# EAGLE board MBO (EAGLE 7.4.0)
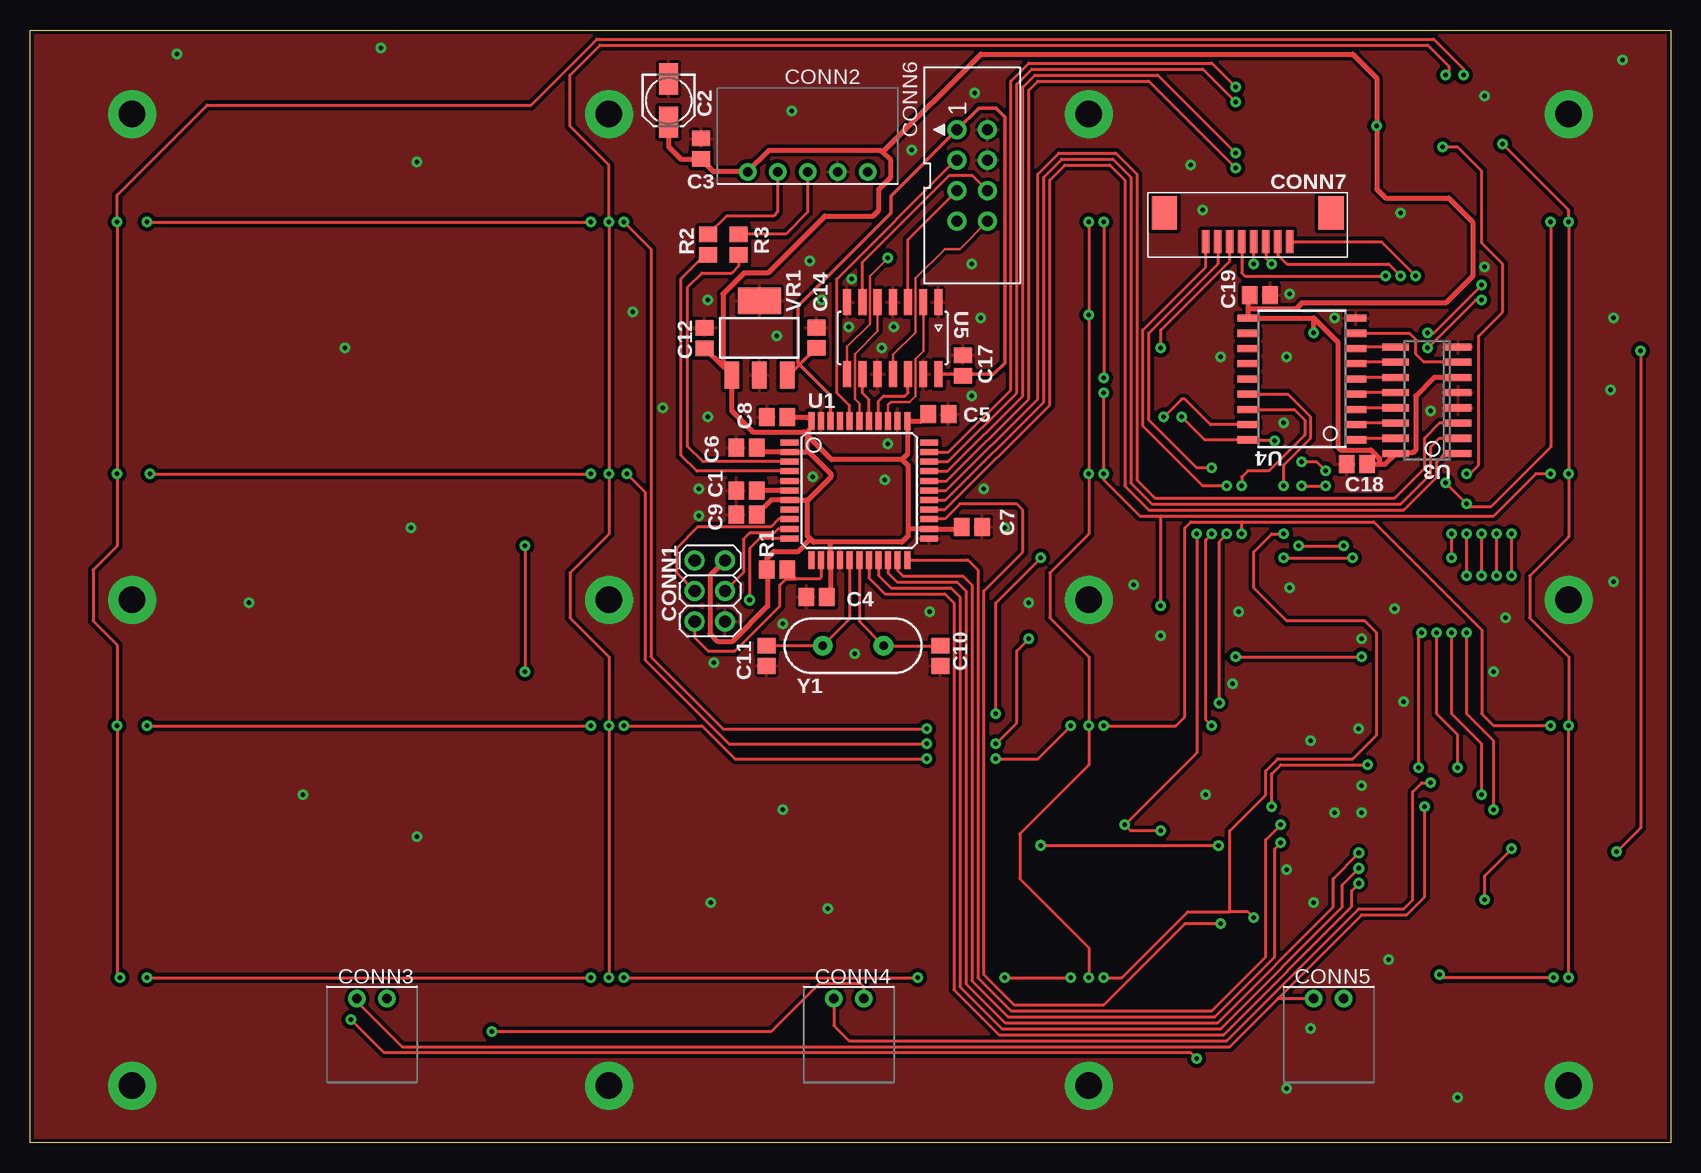
[diagram p0: board, top side]
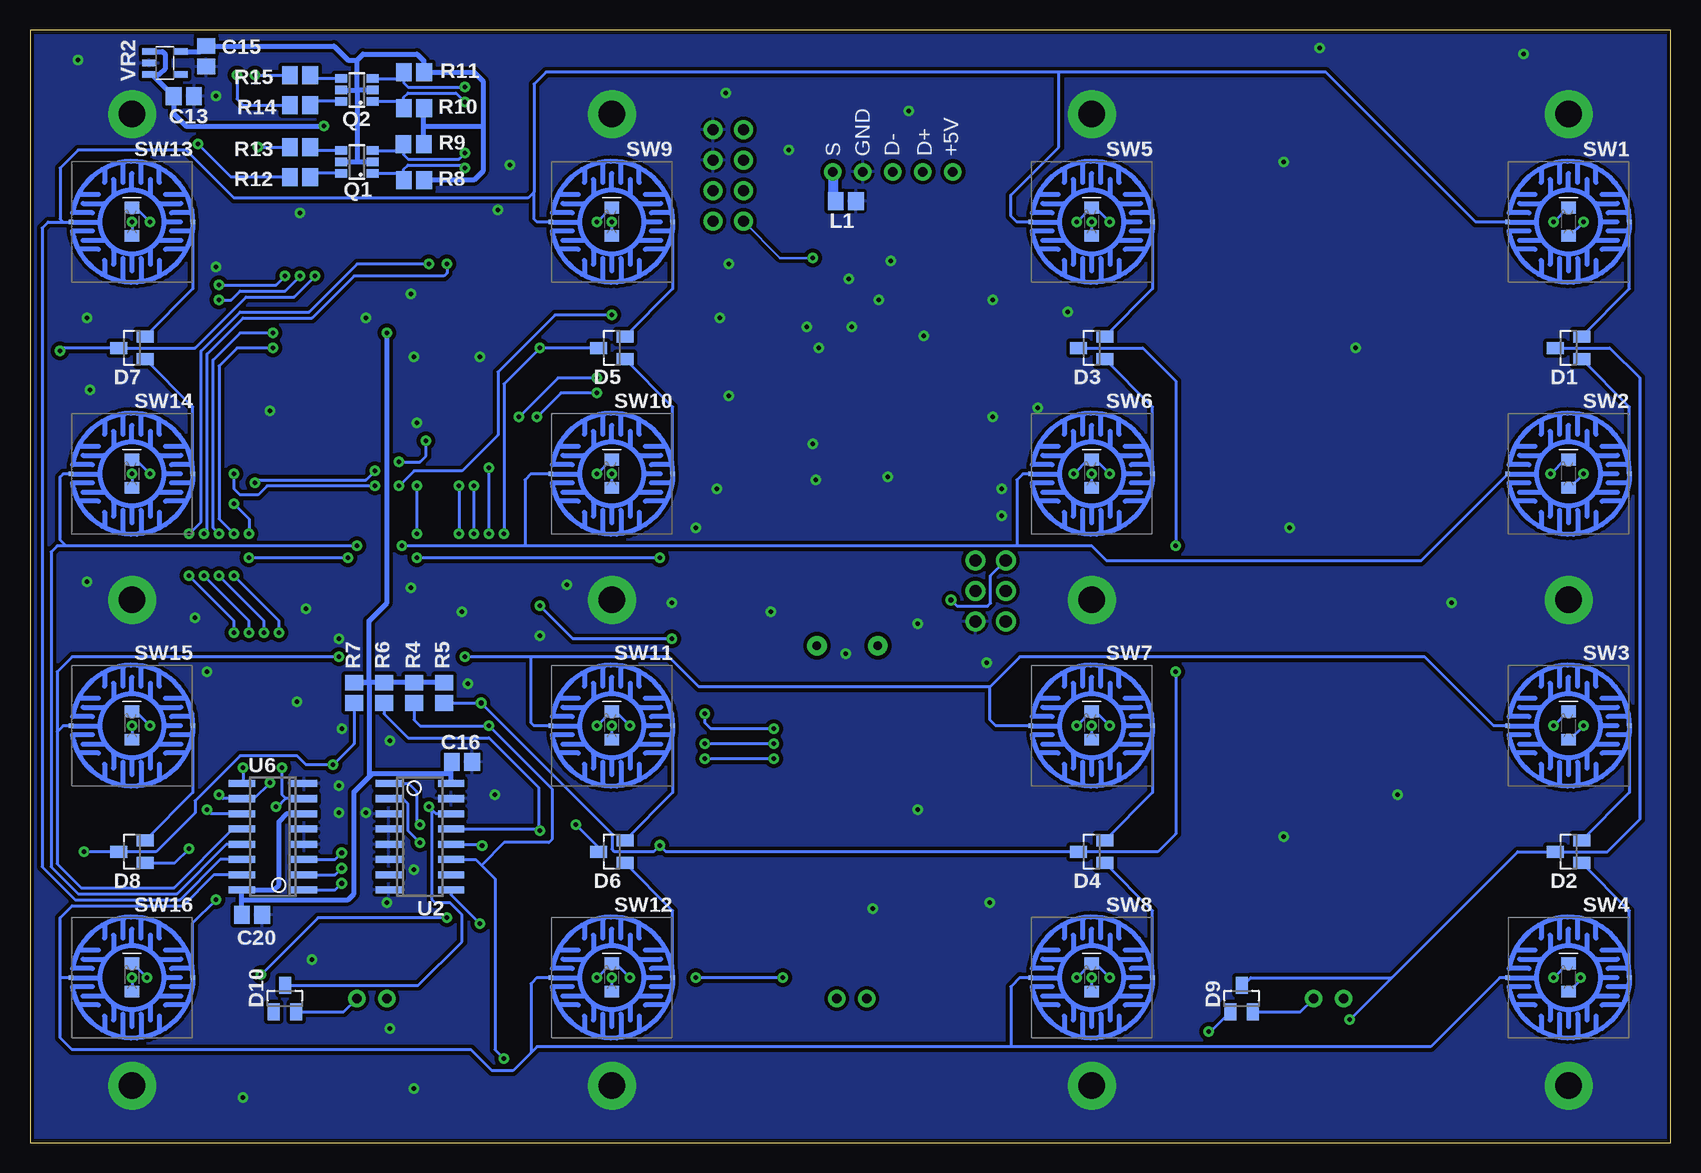
[diagram p1: board, bottom side, seen from below]

Size 136.75 x 92.75 mm. Coordinates in mm from the lower left corner, seen from the top.
Outline: 0,92.75 136.75,92.75 136.75,0 0,0 0,92.75
Copper layers (1*16): Top 0.035mm / dielectric 1.5mm / Bottom 0.035mm
Design rules "smiery *": minimum track width 8mil, minimum drill 12mil, track to track 7mil, track to pad 5mil, pad to pad 5mil, via to via 6mil, smd to smd 0mil, copper to edge 12mil, drill to drill 10mil, minimum pad ring 13mil, minimum via ring 10mil, stop-mask expansion 2mil, vias tented up to drill 25mil, thermal gap 10mil
Net classes: 0 default: width 0.203 mm; 1 vcc: width 0.254 mm

## Footprints (pad centres in the part's own frame; a part is rotated, then mirrored left to right if it is on the bottom)
C0805 = smd 1.3 x 1.5: 1 -0.85,0; 2 0.85,0
153CLV-0405 = smd 2.6 x 1.6: + 1.8,0; - -1.8,0
2X03-2.54-V = drill 1.016: 1 -2.54,-1.27; 2 -2.54,1.27; 3 0,-1.27; 4 0,1.27; 5 2.54,-1.27; 6 2.54,1.27
JST-XH-05P-H = drill 0.8: 1 -5,0; 2 -2.5,0; 3 0,0; 4 2.5,0; 5 5,0
JST-XH-02P-H = drill 0.8: 1 -1.25,0; 2 1.25,0
IDC-08P-2.54 = drill 0.914: 1 -3.81,-1.27; 2 -3.81,1.27; 3 -1.27,-1.27; 4 -1.27,1.27; 5 1.27,-1.27; 6 1.27,1.27; 7 3.81,-1.27; 8 3.81,1.27
MOLEX-52793-0870 = smd 0.6 x 1.9: 1 -3.5,1.4; 2 -2.5,1.4; 3 -1.5,1.4; 4 -0.5,1.4; 5 0.5,1.4; 6 1.5,1.4; 7 2.5,1.4; 8 3.5,1.4 | smd 2.1 x 2.8: P1 -6.95,-1; P2 6.95,-1
SOT23 = smd 1.4 x 1: 1 -1.1,0.95; 2 -1.1,-0.95; 3 1.1,0
0805_LED = smd 0.978 x 1.2: A -1.175,0; C 1.18,0
L0805 = smd 1.3 x 1.5: 1 -0.85,0; 2 0.85,0
SSOT6 = smd 0.99 x 0.69: 1 -1.3,0.95; 2 -1.3,0; 3 -1.3,-0.95; 4 1.3,-0.95; 5 1.3,0; 6 1.3,0.95
R0805 = smd 1.3 x 1.5: 1 -0.85,0; 2 0.85,0
RUBBER_SWITCH_2 = smd 0.4 x 0.4: 1 -5.08,0; 2 5.08,0
TQFP-44 = smd 1.5 x 0.5: 1 -5.8,4; 2 -5.8,3.2; 3 -5.8,2.4; 4 -5.8,1.6; 5 -5.8,0.8; 6 -5.8,0; 7 -5.8,-0.8; 8 -5.8,-1.6; 9 -5.8,-2.4; 10 -5.8,-3.2; 11 -5.8,-4; 23 5.8,-4; 24 5.8,-3.2; 25 5.8,-2.4; 26 5.8,-1.6; 27 5.8,-0.8; 28 5.8,0; 29 5.8,0.8; 30 5.8,1.6; 31 5.8,2.4; 32 5.8,3.2; 33 5.8,4 | smd 0.5 x 1.5: 12 -4,-5.8; 13 -3.2,-5.8; 14 -2.4,-5.8; 15 -1.6,-5.8; 16 -0.8,-5.8; 17 0,-5.8; 18 0.8,-5.8; 19 1.6,-5.8; 20 2.4,-5.8; 21 3.2,-5.8; 22 4,-5.8; 34 4,5.8; 35 3.2,5.8; 36 2.4,5.8; 37 1.6,5.8; 38 0.8,5.8; 39 0,5.8; 40 -0.8,5.8; 41 -1.6,5.8; 42 -2.4,5.8; 43 -3.2,5.8; 44 -4,5.8
SO16 = smd 2.2 x 0.6: 1 -2.6,4.445; 2 -2.6,3.175; 3 -2.6,1.905; 4 -2.6,0.635; 5 -2.6,-0.635; 6 -2.6,-1.905; 7 -2.6,-3.175; 8 -2.6,-4.445; 9 2.6,-4.445; 10 2.6,-3.175; 11 2.6,-1.905; 12 2.6,-0.635; 13 2.6,0.635; 14 2.6,1.905; 15 2.6,3.175; 16 2.6,4.445
SO18 = smd 1.8 x 0.6: 1 -4.475,5.08; 2 -4.475,3.81; 3 -4.475,2.54; 4 -4.475,1.27; 5 -4.475,0; 6 -4.475,-1.27; 7 -4.475,-2.54; 8 -4.475,-3.81; 9 -4.475,-5.08; 10 4.475,-5.08; 11 4.475,-3.81; 12 4.475,-2.54; 13 4.475,-1.27; 14 4.475,0; 15 4.475,1.27; 16 4.475,2.54; 17 4.475,3.81; 18 4.475,5.08
SOIC14 = smd 2.2 x 0.66: 1 -3,3.81; 2 -3,2.54; 3 -3,1.27; 4 -3,0; 5 -3,-1.27; 6 -3,-2.54; 7 -3,-3.81; 8 3,-3.81; 9 3,-2.54; 10 3,-1.27; 11 3,0; 12 3,1.27; 13 3,2.54; 14 3,3.81
SOT223 = smd 2.235 x 1.219: 1 -3.099,2.311; 2 -3.099,0; 3 -3.099,-2.311 | smd 2.2 x 3.6: 4 3.099,0
SOT23-5 = smd 1.2 x 0.55: 1 1.3,-0.95; 2 1.3,0; 3 1.3,0.95; 4 -1.3,0.95; 5 -1.3,-0.95
HC49US = drill 0.7 pad 1.651: 1 -2.54,0; 2 2.54,0

## Placement (x,y rotation side)
C1  1u  [C0805]  59.73,54.37 180 top
C2  10n  [153CLV-0405]  53.23,86.86 270 top
C3  100n  [C0805]  55.92,82.84 90 top
C4  100n  [C0805]  65.57,45.48 180 top
C5  100n  [C0805]  75.73,60.72 0 top
C6  100n  [C0805]  59.73,57.92 180 top
C7  100n  [C0805]  78.52,51.32 0 top
C8  100n  [C0805]  62.27,60.46 180 top
C9  100n  [C0805]  59.73,52.33 180 top
C10  22p  [C0805]  75.88,40.58 90 top
C11  22p  [C0805]  61.4,40.58 90 top
C12  4.7u  [C0805]  56.23,67.07 90 top
C13  4.7u  [C0805]  123.92,87.23 0 bottom
C14  4.7u  [C0805]  65.55,67.09 90 top
C15  4.7u  [C0805]  122.08,90.56 270 bottom
C16  100n  [C0805]  100.75,31.75 180 bottom
C17  100n  [C0805]  77.76,64.78 90 top
C18  100n  [C0805]  110.6,56.54 0 top
C19  100n  [C0805]  102.53,70.66 180 top
C20  100n  [C0805]  118.25,19 180 bottom
CONN1  PINHD-2X03-TH-2.54MM-V  [2X03-2.54-V]  56.68,45.98 270 top
CONN2  PINHD-1X05-JST-XH-H  [JST-XH-05P-H]  64.82,80.92 0 top
CONN3  PINHD-1X02-JST-XH-H  [JST-XH-02P-H]  28.5,12 180 top
CONN4  PINHD-1X02-JST-XH-H  [JST-XH-02P-H]  68.25,12 180 top
CONN5  PINHD-1X02-JST-XH-H  [JST-XH-02P-H]  108.25,12 180 top
CONN6  PINHD-2X04-IDC-2.54-V  [IDC-08P-2.54]  78.54,80.62 270 top
CONN7  PINHD-1X08-FFC-1MM  [MOLEX-52793-0870]  101.5,76.5 180 top
D1  BAW56  [SOT23]  8.5,66.25 180 bottom
D2  BAW56  [SOT23]  8.5,24.25 180 bottom
D3  BAW56  [SOT23]  48.25,66.25 180 bottom
D4  BAW56  [SOT23]  48.25,24.25 180 bottom
D5  BAW56  [SOT23]  88.25,66.25 180 bottom
D6  BAW56  [SOT23]  88.25,24.25 180 bottom
D7  BAW56  [SOT23]  128.25,66.25 180 bottom
D8  BAW56  [SOT23]  128.25,24.25 180 bottom
D9  BAW56  [SOT23]  35.75,12 90 bottom
D10  BAW56  [SOT23]  115.5,12 90 bottom
D11  [0805_LED]  8.5,76.75 90 bottom
D12  [0805_LED]  8.5,55.75 90 bottom
D13  [0805_LED]  8.5,34.75 90 bottom
D14  [0805_LED]  8.5,13.75 90 bottom
D15  [0805_LED]  48.25,76.75 90 bottom
D16  [0805_LED]  48.25,55.75 90 bottom
D17  [0805_LED]  48.25,34.75 90 bottom
D18  [0805_LED]  48.25,13.75 90 bottom
D19  [0805_LED]  88.25,76.75 90 bottom
D20  [0805_LED]  88.25,55.75 90 bottom
D21  [0805_LED]  88.25,34.75 90 bottom
D22  [0805_LED]  88.25,13.75 90 bottom
D23  [0805_LED]  128.25,76.75 90 bottom
D24  [0805_LED]  128.25,55.75 90 bottom
D25  [0805_LED]  128.25,34.75 90 bottom
D26  [0805_LED]  128.25,13.75 90 bottom
L1  [L0805]  68.75,78.5 180 bottom
Q1  FDC6312P  [SSOT6]  109.5,81.75 180 bottom
Q2  FDC6312P  [SSOT6]  109.5,87.75 180 bottom
R1  10k  [R0805]  62.27,47.76 180 top
R2  22  [R0805]  56.53,74.86 90 top
R3  22  [R0805]  59.07,74.86 90 top
R4  10k  [R0805]  104.75,37.5 90 bottom
R5  10k  [R0805]  102.25,37.5 90 bottom
R6  10k  [R0805]  107.25,37.5 90 bottom
R7  10k  [R0805]  109.75,37.5 90 bottom
R8  4k7  [R0805]  104.75,80.25 180 bottom
R9  4k7  [R0805]  104.77,83.24 180 bottom
R10  4k7  [R0805]  104.75,86.25 180 bottom
R11  4k7  [R0805]  104.75,89.25 180 bottom
R12  36R  [R0805]  114.25,80.5 180 bottom
R13  36R  [R0805]  114.25,83 180 bottom
R14  36R  [R0805]  114.25,86.5 180 bottom
R15  36R  [R0805]  114.25,89 180 bottom
SW1  [RUBBER_SWITCH_2]  8.5,76.75 180 bottom
SW2  [RUBBER_SWITCH_2]  8.5,55.75 180 bottom
SW3  [RUBBER_SWITCH_2]  8.5,34.75 180 bottom
SW4  [RUBBER_SWITCH_2]  8.5,13.75 180 bottom
SW5  [RUBBER_SWITCH_2]  48.25,76.75 180 bottom
SW6  [RUBBER_SWITCH_2]  48.25,55.75 180 bottom
SW7  [RUBBER_SWITCH_2]  48.25,34.75 180 bottom
SW8  [RUBBER_SWITCH_2]  48.25,13.75 180 bottom
SW9  [RUBBER_SWITCH_2]  88.25,76.75 180 bottom
SW10  [RUBBER_SWITCH_2]  88.25,55.75 180 bottom
SW11  [RUBBER_SWITCH_2]  88.25,34.75 180 bottom
SW12  [RUBBER_SWITCH_2]  88.25,13.75 180 bottom
SW13  [RUBBER_SWITCH_2]  128.25,76.75 180 bottom
SW14  [RUBBER_SWITCH_2]  128.25,55.75 180 bottom
SW15  [RUBBER_SWITCH_2]  128.25,34.75 180 bottom
SW16  [RUBBER_SWITCH_2]  128.25,13.75 180 bottom
U1  ATMEGA-32U4TQFP  [TQFP-44]  69.13,54.37 0 top
U2  74HC165  [SO16]  104.25,25.5 0 bottom
U3  74HC238-SO  [SO16]  116.44,61.88 180 top
U4  ULN2803A-SO  [SO18]  106.03,63.66 180 top
U5  74AHC125  [SOIC14]  71.92,67.07 270 top
U6  74HC138-SO  [SO16]  116.5,25.5 180 bottom
VR1  MCP1825  [SOT223]  60.8,67.08 90 top
VR2  LP5907-4.5V  [SOT23-5]  125.5,90 180 bottom
Y1  16MHz  [HC49US]  68.62,41.41 180 top

## Library data of the parts
C1 C3-C20 CONN1-CONN7 D11-D26 L1 R1-R15 SW1-SW16 = igor_lbr
C2 = igor_lbr; MANUFACTURER: Multicomp; MPN: MCVVT016M100CA1L
D1-D10 = igor_lbr; MANUFACTURER: Multicomp; MPN: BAW56-7-F
Q1 Q2 = igor_lbr; MANUFACTURER: ON Semiconductor; MPN: FDC6312P
U1 = igor_lbr; MPN: ATMEGA32U4-AUR
U2 = igor_lbr; MANUFACTURER: Nexperia; MPN: 74HC165D
U3 = igor_lbr; MANUFACTURER: Nexperia; MPN: 74HC238D
U4 = igor_lbr; MANUFACTURER: Texas Instruments; MPN: ULN2803ADWR
U5 = igor_lbr; MANUFACTURER: Texas Instruments; MPN: SN74AHC125DR
U6 = igor_lbr; MANUFACTURER: Nexperia; MPN: 74HC138D
VR1 = igor_lbr; MANUFACTURER: Microchip; MPN: MCP1825S-3302E/DB
VR2 = igor_lbr; MANUFACTURER: Texas Instruments; MPN: LP5907MFX-4.5/NOPB
Y1 = igor_lbr; MANUFACTURER: TXC; MPN: 9B-8.000MEEJ-B

## Nets
+3V3: C14.1 C17.1 CONN6.1 U1.42 U5.14 VR1.3
+5V: C2.+ C3.1 C4.1 C5.1 C6.1 C7.1 C8.1 C9.1 C12.1 C13.1 C16.2 C18.2 C19.2 C20.2 CONN1.2 CONN2.1 R1.2 R4.2 R5.2 R6.2 R7.2 U1.2 U1.7 U1.14 U1.24 U1.34 U1.44 U2.16 U3.6 U3.16 U4.10 U6.6 U6.16 VR1.1 VR2.1 VR2.3
BC_1: SW4.2 SW8.2 SW12.2 SW16.2 U6.15
BC_2: SW1.2 SW5.2 SW9.2 SW13.2 U6.14
BC_3: SW2.2 SW6.2 SW10.2 SW14.2 U6.13
BC_4: SW3.2 SW7.2 SW11.2 SW15.2 U6.12
BC_5: CONN7.3 U6.11
BC_6: CONN4.2 CONN7.4 U6.10
BC_7: CONN7.1 U6.9
BC_8: CONN3.2 CONN5.2 CONN7.2 U6.7
BR_1: CONN7.7 D1.3 D2.3 D9.3 R4.1 U2.11
BR_2: CONN7.8 D3.3 D4.3 R5.1 U2.12
BR_3: CONN7.6 D5.3 D6.3 R6.1 U2.13
BR_4: CONN7.5 D7.3 D8.3 D10.3 R7.1 U2.14
D+: R2.1 U1.4
D+R: CONN2.2 R2.2
D-: R3.1 U1.3
D-R: CONN2.3 R3.2
DEC_IN_S0: U1.18 U6.1
DEC_IN_S1: U1.19 U6.2
DEC_IN_S2: U1.20 U6.3
DEC_OUT_S0: U1.26 U3.1
DEC_OUT_S1: U1.27 U3.2
DEC_OUT_S2: U1.28 U3.3
GND: C1.2 C2.- C3.2 C4.2 C5.2 C6.2 C7.2 C8.2 C9.2 C10.1 C11.1 C12.2 C13.2 C14.2 C15.2 C16.1 C17.2 C18.1 C19.1 C20.1 CONN1.6 CONN2.4 CONN6.2 CONN6.4 L1.1 U1.5 U1.15 U1.23 U1.35 U1.43 U2.3 U2.4 U2.5 U2.6 U2.8 U2.15 U3.4 U3.5 U3.8 U4.9 U5.1 U5.4 U5.7 U5.10 U5.13 U6.4 U6.5 U6.8 VR1.2 VR1.4 VR2.2
LC_1: D11.C D15.C D19.C D23.C U4.18
LC_2: D12.C D16.C D20.C D24.C U4.17
LC_3: D13.C D17.C D21.C D25.C U4.16
LC_4: D14.C D18.C D22.C D26.C U4.15
LEDS_VCC: C15.1 Q1.2 Q1.5 Q2.2 Q2.5 R8.1 R9.1 R10.1 R11.1 VR2.5
LR_1_MI: Q1.1 R8.2 U1.29
LR_1_MO: D23.A D24.A D25.A D26.A R12.2
LR_2_MI: Q1.3 R9.2 U1.30
LR_2_MO: D19.A D20.A D21.A D22.A R13.2
LR_3_MI: Q2.1 R10.2 U1.31
LR_3_MO: D11.A D12.A D13.A D14.A R14.2
LR_4_MI: Q2.3 R11.2 U1.32
LR_4_MO: D15.A D16.A D17.A D18.A R15.2
MISO: CONN1.1 U1.11
MOSI: CONN1.4 U1.10
MUX_COMMON_1: CONN6.3 U1.40
MUX_S0_3V3: CONN6.8 U5.11
MUX_S0_5V: U1.37 U5.12
MUX_S1_3V3: CONN6.7 U5.8
MUX_S1_5V: U1.38 U5.9
MUX_S2_3V3: CONN6.5 U5.3
MUX_S2_5V: U1.36 U5.2
MUX_S3_3V3: CONN6.6 U5.6
MUX_S3_5V: U1.39 U5.5
N$1: C1.1 U1.6
N$2: U3.15 U4.1
N$3: U3.14 U4.2
N$4: U3.13 U4.3
N$5: U3.12 U4.4
N$6: U3.11 U4.5
N$7: U3.10 U4.6
N$8: U3.9 U4.7
N$9: U3.7 U4.8
N$10: CONN2.5 L1.2
N$12: D1.2 SW1.1
N$13: D1.1 SW2.1
N$14: D2.2 SW3.1
N$15: D2.1 SW4.1
N$16: D3.2 SW5.1
N$17: D3.1 SW6.1
N$18: D4.2 SW7.1
N$19: D4.1 SW8.1
N$20: D5.2 SW9.1
N$21: D5.1 SW10.1
N$22: D6.2 SW11.1
N$23: D6.1 SW12.1
N$24: D7.2 SW13.1
N$25: D7.1 SW14.1
N$26: D8.2 SW15.1
N$27: D8.1 SW16.1
N$28: Q1.6 R12.1
N$29: Q1.4 R13.1
N$30: Q2.4 R15.1
N$31: Q2.6 R14.1
RESET: CONN1.5 R1.1 U1.13
SCK: CONN1.3 U1.9
SR_IN_CLK: U1.21 U2.2
SR_IN_DATA: U1.25 U2.9
SR_IN_PL: U1.22 U2.1
SW_M_11: CONN3.1 D9.2
SW_M_21: CONN4.1 D9.1
SW_M_31: CONN5.1 D10.2
XTAL1: C10.2 U1.17 Y1.1
XTAL2: C11.2 U1.16 Y1.2

## Tracks (layer width: path | path; a pad name or v marks a point on that pad's centre or on a via)
+3V3
  Top 0.305: C17.1 77.63,64.07 U5.14 80.32,64.07 81.25,65 81.25,85.5 80.5,86.25 79.09,86.25 CONN6.1 71.75,78.91 71.75,77.5 64,69.75 64,65 64.16,64.84 | VR1.3 63.29,63.98 64.16,64.84 | 64.16,64.84 C14.1 | U1.42 66.73,62.27 64.16,64.84
+5V  (via drill 0.4 pad 0.6)
  Top 0.406: C4.1 66.73,45.78 U1.14 66.73,49.91 66.59,50.05 | C5.1 74.33,60.17 U1.34 73.13,57.38 72.68,56.93 | C7.1 77.52,51.17 U1.24 73.29,51.17 73.19,51.06 | C6.1 60.93,57.57 U1.2 64.71,57.57 64.81,57.67 | C9.1 61.81,53.57 U1.7 64.77,53.57 64.81,53.6 64.81,50.56 65.06,50.3 | 72.68,56.93 73.19,56.43 73.19,51.06 | 73.19,51.06 73.19,50.56 72.68,50.05 66.59,50.05 | 66.59,50.05 65.32,50.05 65.06,50.3 | 65.06,50.3 64.05,49.29 62.01,49.29 61.42,48.69 R1.2 61.51,47.67 61.51,44.76 58.5,41.75 57.36,41.75 56.68,42.43 56.68,47.25 CONN1.2 | 71.06,82.56 71.75,81.88 71.75,80.5 70.75,79.5 70.75,77.75 70.25,77.25 66.25,77.25 61.5,72.5 59.5,72.5 57.75,70.75 57.75,64.72 | 71.06,82.56 70.92,82.7 61.6,82.7 CONN2.1 56.99,80.92 C3.1 54.25,82 53.23,83.02 C2.+ | C12.1 56.25,66.22 57.75,64.72 | 57.75,64.72 VR1.1 58.49,61.01 60.25,59.25 64.5,59.25 64.62,59.12 | C8.1 64.83,60.46 U1.44 65.13,59.63 64.62,59.12 | 107,68.74 U4.10 101.56,69.5 | 107,68.74 107.01,68.74 109,66.75 109,58 109.25,57.75 111.75,57.75 112.5,57 112.5,56.75 112.29,56.54 C18.2 112.95,56.54 U3.16 113.91,57.5 115.25,57.5 115.5,57.75 115.5,62.25 117.03,63.78 U3.6 | 71.06,82.56 79.25,90.75 110.25,90.75 112.25,88.75 v112.25,84.75 112.25,79.5 113,78.75 118.25,78.75 120.25,76.75 120.25,72.25 118,70 106,70 105.5,69.5 101.56,69.5 | 101.56,69.5 101.56,70.54 C19.2 | v107,67.5 107,68.74 | 64.81,57.67 64.81,58.94 | 64.81,58.94 64.62,59.12 | 72.68,56.93 66.82,56.93 64.81,58.94 | 64.81,57.67 64.83,57.67 66.75,55.75 66.75,55.5 64.75,53.5
  Bottom 0.406: C20.2 119.1,20.33 | 119.1,20.33 U6.16 116.44,21.05 116,21.5 116,26.75 115.34,27.41 U6.6 | U2.16 101.65,30.75 | 101.65,30.75 101.65,31.7 C16.2 | 101.65,30.75 108.25,30.75 108.5,30.5 | 108.5,30.5 109.75,29.25 109.75,20.75 110.25,20.25 119.02,20.25 119.1,20.33 | R5.2 R4.2 R6.2 R7.2 108.6,38.35 108.5,38.25 | 108.5,38.25 108.5,30.5 | 108.5,38.25 108.5,43.5 107,45 v107,67.5 | VR2.1 125.7,90.95 125.5,90.75 125.5,89.5 125.95,89.05 VR2.3 126.59,89.05 C13.1 124.77,85.77 123.75,84.75 v112.25,84.75
BC_1
  Bottom 0.254: 55,8 20,8 14.25,13.75 SW4.2 | 55,8 94.5,8 95,7.5 | 95,7.5 96.5,6 98.25,6 100,7.75 133.25,7.75 134.25,8.75 134.25,13.75 | 95,7.5 95,13.25 94.5,13.75 SW12.2 | 55,8 55,13 54.25,13.75 SW8.2 | 134.25,13.75 134.25,18.75 133.25,19.75 124,19.75 121.42,22.32 U6.15 | SW16.2 134.25,13.75
BC_2
  Bottom 0.254: 51,89.25 28.75,89.25 16.25,76.75 SW1.2 | 51,89.25 93.75,89.25 94.75,88.25 94.75,79.25 | 94.75,79.25 95.25,78.75 119.75,78.75 123.75,82.75 132.75,82.75 134.25,81.25 134.25,77 134,76.75 SW13.2 | 94.75,79.25 94.75,77 94.5,76.75 SW9.2 | 133.25,76.75 SW13.2 | U6.14 120.91,23.59 124.25,20.25 133,20.25 135.75,23 135.75,76.25 135.25,76.75 SW13.2 | 51,89.25 51,83 55,79 55,77.25 54.5,76.75 SW5.2
BC_3  (via drill 0.4 pad 0.6)
  Top 0.254: v105.75,49.75 v109.5,49.75
  Bottom 0.254: 54.5,49.75 48.25,49.75 47,48.5 20.83,48.5 SW2.2 | 54.5,49.75 95.5,49.75 | 95.5,49.75 v105.75,49.75 | v109.5,49.75 133.75,49.75 | 133.75,49.75 134.25,50.25 134.25,55.5 134,55.75 SW14.2 | 95.5,49.75 95.5,55.25 95,55.75 SW10.2 | 54.5,49.75 54.5,55.25 54,55.75 SW6.2 | 133.75,49.75 134.5,49.75 135,49.25 135,23 132.75,20.75 124.5,20.75 120.39,24.86 U6.13
BC_4  (via drill 0.4 pad 0.6)
  Top 0.254: v100.5,40.5 v111,40.5
  Bottom 0.254: 56.75,38 54.25,40.5 20.5,40.5 14.75,34.75 SW3.2 | 56.75,38 81,38 83.5,40.5 95,40.5 | 95,40.5 v100.5,40.5 | v111,40.5 133.25,40.5 134.5,39.25 134.5,34.25 | 95,40.5 95,35 94.75,34.75 SW11.2 | 56.75,38 56.75,35.25 56.25,34.75 SW7.2 | 134.5,34.25 134,34.75 SW15.2 133.25,34.75 | 134.5,34.25 134.5,23.25 132.5,21.25 124.75,21.25 119.86,26.14 U6.12
BC_5  (via drill 0.4 pad 0.6)
  Top 0.254: v122,27.75 122,33.5 119.75,35.75 v119.75,42.5 | v123.5,47.25 v123.5,50.75 | CONN7.3 103,73.75 v103.5,73.25
  Bottom 0.254: U6.11 121.66,27.41 v122,27.75 | v123.5,50.75 122.5,51.75 122.5,66 119.25,69.25 113.5,69.25 109.5,73.25 v103.5,73.25 | v119.75,42.5 119.75,43.5 v123.5,47.25
BC_6  (via drill 0.4 pad 0.6)
  Top 0.254: v121,29 121,33.25 118.5,35.75 v118.5,42.5 | v122.25,47.25 v122.25,50.75 | CONN4.2 67,9.75 68.25,8.5 99.75,8.5 110.75,19.5 114.5,19.5 115.25,20.25 115.25,29.25 116,30 v116.75,30 | v102,73.25 CONN7.4
  Bottom 0.254: v121,29 120.67,28.68 U6.10 118.08,28.68 v116.75,30 | v122.25,50.75 122,51 122,65.75 119,68.75 113.25,68.75 109.75,72.25 102.25,72.25 102,72.5 v102,73.25 | v118.5,42.5 118.5,43.5 v122.25,47.25
BC_7  (via drill 0.4 pad 0.6)
  Top 0.254: v119,31.25 119,34 117.25,35.75 v117.25,42.5 | v121,47.25 v121,50.75 | v116.5,67.5 117,67.5 v121,71.5 | CONN7.1 112.65,75.1 v115.5,72.25
  Bottom 0.254: 119.19,29.95 U6.9 119,30.05 v119,31.25 | v121,50.75 121.5,51.25 121.5,65.25 119.25,67.5 v116.5,67.5 | v117.25,42.5 117.25,43.5 v121,47.25 | v121,71.5 116.25,71.5 v115.5,72.25
BC_8  (via drill 0.4 pad 0.6)
  Top 0.254: v115.75,31.25 115.75,42.25 v116,42.5 | v119.75,47.25 v119.75,50.75 | v116.5,66.25 120.5,70.25 v121,70.25 | CONN3.2 27.25,11.75 31,8 100,8 104,12 | 104,12 111,19 114.75,19 116.25,20.5 v116.25,28 | CONN5.2 104,12 | CONN7.2 104,74 104.75,73.25 113.25,73.25 v114.25,72.25
  Bottom 0.254: v115.75,31.25 115.75,29 115.42,28.68 | v116,42.5 116,43.5 v119.75,47.25 | v121,70.25 120,70.25 119.25,71 115.5,71 v114.25,72.25 | v116.5,66.25 119.5,66.25 121,64.75 121,52 v119.75,50.75 | U6.7 115.42,28.68 | v116.25,28 116.1,28 115.42,28.68
BR_1  (via drill 0.4 pad 0.6)
  Top 0.254: v97.25,7 96.75,7.5 29.5,7.5 v26.75,10.25 | v98.5,34.75 98,35.25 98,50.25 v98.5,50.75 | v98.5,56.25 97.25,56.25 93.25,60.25 93.25,67.5 99,73.25 CONN7.7
  Bottom 0.254: U2.11 99.59,23.59 99.12,23.12 | 99.12,23.12 98,22 98,7.75 v97.25,7 | v26.75,10.25 23.25,13.75 | 23.25,13.75 12.75,24.25 D2.3 5.26,24.25 2.58,26.93 2.58,63.76 5.06,66.25 D1.3 | 99.12,23.12 97.23,25.01 93.5,25.01 93.25,25.26 93.25,29.5 v98.5,34.75 104.25,34.75 104.75,35.25 R4.1 | v98.5,50.75 v98.5,56.25 | D9.3 35.65,13.1 35,13.75 23.25,13.75
BR_2  (via drill 0.4 pad 0.6)
  Top 0.254: v41.25,49.75 v41.25,39.25 | CONN7.8 98,73 92.75,67.75 92.75,59.75 97.75,54.75 v99.75,54.75 | v99.06,24.75 v84.26,24.75 v84.25,24.76 | v99.15,36.65 99.15,50.1 99.75,50.7 v99.75,50.75
  Bottom 0.254: D3.3 44,66.25 41.25,63.5 v41.25,49.75 | v41.25,39.25 41.25,25.75 42.75,24.25 D4.3 83.74,24.25 v84.25,24.76 | U2.12 99.17,24.86 v99.06,24.75 | R5.1 v99.15,36.65 88.25,25.75 88.25,24.46 88.05,24.27 84.74,24.27 v84.25,24.76 | v84.26,24.76 v84.25,24.76 | v99.75,50.75 v99.75,54.75
BR_3  (via drill 0.4 pad 0.6)
  Top 0.254: v97.25,50.75 97.25,32.5 v91.25,26.5 91.75,26 v94.25,26 | v94.25,66.25 94.25,67.75 100,73.5 CONN7.6
  Bottom 0.254: D5.3 v94.25,66.25 97.25,63.25 v97.25,50.75 | D6.3 89.35,24.6 v91.25,26.5 | U2.13 94.39,26.14 v94.25,26 94.38,26.12 94.38,29.62 98.5,33.75 105.25,33.75 107.25,35.75 R6.1
BR_4  (via drill 0.4 pad 0.6)
  Top 0.254: v134.25,66 134.25,26.25 v132.25,24.25 | v103.5,28 103.5,30.75 104.25,31.5 v111.5,31.5 | CONN7.5 101,72.5 101.25,72.25 v113,72.25
  Bottom 0.254: v134.25,66 134,66.25 D7.3 123,66.25 118.75,70.5 114.75,70.5 v113,72.25 | v132.25,24.25 D8.3 126.25,24.25 123,27.5 123,28.5 119.25,32.25 114.5,32.25 113.75,31.5 v111.5,31.5 109.75,33.25 R7.1 | U2.14 102.91,27.41 v103.5,28 103.25,27.75 103.25,20.25 103,20 101.75,20 100.75,19 100.75,16.75 104.4,13.1 D10.3
D+
  Top 0.254: U1.4 55.59,55.97 54.28,57.28 54.28,72.01 56.28,74.01 R2.1
D+R
  Top 0.254: CONN2.2 62.32,77.57 62,77.25 58.07,77.25 R2.2
D-
  Top 0.254: U1.3 56.09,56.77 54.82,58.03 54.82,71.32 56,72.5 58.5,72.5 59.07,73.07 R3.1
D-R
  Top 0.254: CONN2.3 64.82,77.57 63,75.75 59.11,75.75 R3.2
DEC_IN_S0  (via drill 0.4 pad 0.6)
  Top 0.254: U1.18 69.93,47.07 71.25,45.75 76.25,45.75 77,45 77,12.75 80.75,9 99.5,9 110.18,19.68 110.18,21 v110.78,21.6
  Bottom 0.254: U6.1 111.33,21.05 v110.78,21.6
DEC_IN_S1  (via drill 0.4 pad 0.6)
  Top 0.254: U1.19 70.73,47.27 71.75,46.25 76.75,46.25 77.5,45.5 77.5,13 81,9.5 99.25,9.5 109.41,19.66 109.41,21.5 v110.78,22.87
  Bottom 0.254: U6.2 111.33,22.32 v110.78,22.87
DEC_IN_S2  (via drill 0.4 pad 0.6)
  Top 0.254: U1.20 71.53,47.47 72.25,46.75 77.25,46.75 78,46 78,13.25 81.25,10 99,10 108.64,19.64 108.64,22 v110.78,24.14
  Bottom 0.254: U6.3 111.33,23.59 v110.78,24.14
DEC_OUT_S0
  Top 0.254: U3.1 117.93,57.43 117.25,56.75 117.25,55.5 114.5,52.75 93.25,52.75 91.25,54.75 91.25,80.25 90,81.5 86.25,81.5 85,80.25 85,61.5 76.27,52.77 U1.26
DEC_OUT_S1
  Top 0.254: U1.27 76.32,53.57 84.5,61.75 84.5,80.5 86,82 90.25,82 91.75,80.5 91.75,55 93.5,53.25 114.25,53.25 116.75,55.75 116.75,58 117.45,58.7 U3.2
DEC_OUT_S2
  Top 0.254: U1.28 76.37,54.37 84,62 84,80.75 85.75,82.5 90.5,82.5 92.25,80.75 92.25,55.25 93.75,53.75 113.75,53.75 116.25,56.25 116.25,58.75 117.47,59.97 U3.3
GND  (via drill 0.4 pad 0.6, 2.2 pad 4)
  other vias: 8.5,85.75 8.5,4.75 8.5,45.25 48.25,85.75 88.25,85.75 128.25,85.75 128.25,45.25 128.25,4.75 88.25,4.75 48.25,4.75 48.25,45.25 88.25,45.25 26.25,66.25 18.25,45 31.75,51.25 22.75,29 32.25,25.5 62.75,27.75 32.25,81.75 12.25,90.75 132.75,90.25 104.75,4.5 113.25,15.25 111,29.75 114.5,36.75 94.25,42.25 92,46.5 113.75,44.5 104.75,65.5 97.75,77.75 114.25,77.5 78.5,73.25 79.25,68.75 62.25,67.25 65,73.5 63.5,86 29.25,91.25 71.5,58.25 71.25,55.25 81.25,51.25 66,70.25 68.25,68 72,68 71,66.25 68.5,72 78.5,62.25 56.5,60.5 55.75,54.5 55.75,52.25 65.25,55.5 68.75,40.75 62.75,43.25 57,40 111,27.5 107,20 104.75,22.75 108.75,27.5 98,29 106.75,33.5 110.75,34.5 100.25,38.25 56.5,70.25 121.25,87.25 105,70.75 108.75,68.75 116.75,61 121.25,73 83.25,45 75,44.25 100.75,44.25 111,42 105,46.25 132,46.75 132,68.75 131.75,62.75 96.75,81.5 66.5,19.5 56.75,20 119,3.75 106.75,9.5 79.5,54.5 78.75,87.5 73.5,82.75 50.25,69.25 52.75,61.25 123,43.75 122,39.25 99.25,65.5 104.5,60
  pour Top (isolate 0.305): 0,92.75 136.75,92.75 136.75,0 0,0
  pour Bottom (isolate 0.305): 0,92.75 136.75,92.75 136.75,0 0,0
LC_1  (via drill 0.4 pad 0.6)
  Top 0.254: v9.75,76.75 v46.75,76.75 | v89.5,76.75 v89.5,63.75 | v96,60.5 97.92,58.58 U4.18 103.67,58.58 v103.75,58.5 | v126.75,76.75 126.75,58 121.75,53 120,53 v119.75,53.25 v118,55 | v108,56 107.25,56.75 v106,56.75 | v49.5,76.75 51.75,74.5 51.75,40.5 57.75,34.5 v74.75,34.5 | v80.5,35.75 80.5,45 v84.25,48.75 | v104.5,48.75 v110.25,48.75 | v118.5,48.75 v118.5,50.75
  Bottom 0.254: D11.C 8.57,77.93 v9.75,76.75 | v46.75,76.75 47.93,77.93 D15.C 48.32,77.93 v49.5,76.75 | D19.C 88.32,77.93 v89.5,76.75 | v89.5,63.75 92.75,63.75 v96,60.5 | D23.C 127.93,77.93 v126.75,76.75 | v118,55 117.75,55.25 108.75,55.25 v108,56 | v106,56.75 104.25,56.75 103.75,57.25 v103.75,58.5 | v74.75,34.5 80,34.5 80.5,35 v80.5,35.75 | v84.25,48.75 v104.5,48.75 | v110.25,48.75 v118.5,48.75 | v119.75,53.25 118.5,52 v118.5,50.75
LC_2  (via drill 0.4 pad 0.6)
  Top 0.254: v10,55.75 v46.75,55.75 | 94.25,52.25 92.5,52.25 89.5,55.25 v89.5,55.75 v89.5,62.5 | 94.25,52.25 122,52.25 125.5,55.75 v126.75,55.75 | v49.75,55.75 51.25,54.25 51.25,40.25 58.25,33.25 v74.75,33.25 | v80.5,33.25 82.25,35 82.25,41 v83.25,42 | v94.25,44.75 94.25,52.25 | U4.17 98.4,59.85 96.25,62 96,62 v94.5,60.5
  Bottom 0.254: D12.C 8.82,56.93 v10,55.75 | v46.75,55.75 47.93,56.93 D16.C 48.57,56.93 v49.75,55.75 | D20.C 88.32,56.93 v89.5,55.75 | D24.C 128.25,56.75 127.75,56.75 v126.75,55.75 | v74.75,33.25 v80.5,33.25 | v83.25,42 91.5,42 v94.25,44.75 | v89.5,62.5 92.5,62.5 v94.5,60.5
LC_3  (via drill 0.4 pad 0.6)
  Top 0.254: v9.75,34.75 v46.75,34.75 | v89.5,34.75 95.5,34.75 96.25,35.5 96.25,51.25 96.75,51.75 101,51.75 | 101,51.75 112,51.75 121,42.75 121,35.75 122,34.75 v126.75,34.75 | v49.5,34.75 56,34.75 58.75,32 v74.75,32 | v80.5,32 84,32 v86.75,34.75 | U4.16 105.38,61.12 106.25,60.25 106.25,59 103.25,56 101.5,56 101,55.5 v101,54.75 | v101,50.75 101,51.75
  Bottom 0.254: D13.C 8.57,35.93 v9.75,34.75 | v46.75,34.75 47.93,35.93 D17.C 48.32,35.93 v49.5,34.75 | v89.5,34.75 88.32,35.93 D21.C 87.93,35.93 v86.75,34.75 | D25.C 127.93,35.93 v126.75,34.75 | v74.75,32 v80.5,32 | v101,54.75 v101,50.75
LC_4  (via drill 0.4 pad 0.6)
  Top 0.254: v9.75,13.75 v46.75,13.75 | v89.5,13.75 91,13.75 96.5,19.25 100,19.25 | v102,18.75 101.5,19.25 100,19.25 | v127,13.75 117.75,13.75 v117.5,14 | v49.5,13.75 v74,13.75 | v81.25,13.75 v86.75,13.75 | 100,19.25 100,26 103,29 103,31 104,32 110.25,32 112.25,34 112.25,42.5 111.25,43.5 104.75,43.5 102,46.25 102,49.25 103.5,50.75 v104.5,50.75 | v104.5,54.75 104.5,56.5 106.75,58.75 106.75,60.5 104.86,62.39 U4.15
  Bottom 0.254: D14.C 8.57,14.93 v9.75,13.75 | v46.75,13.75 47.93,14.93 D18.C 48.32,14.93 v49.5,13.75 | v89.5,13.75 88.32,14.93 D22.C 87.93,14.93 v86.75,13.75 | v102,18.75 112.75,18.75 v117.5,14 | D26.C 128.18,14.93 v127,13.75 | v74,13.75 v81.25,13.75 | v104.5,50.75 v104.5,54.75
LEDS_VCC
  Bottom 0.406: Q1.2 109.5,81.75 | 109.5,81.75 Q1.5 | 99,84.75 99,88.5 99.75,89.25 R11.1 103.9,90.15 104.5,90.75 109,90.75 109.5,90.25 | 99,84.75 99,81 99.75,80.25 R8.1 | 103.92,84.75 99,84.75 | R9.1 103.92,84.75 | 103.92,84.75 103.92,86.23 R10.1 | 109.5,87.75 109.5,81.75 | Q2.5 109.5,87.75 | 109.5,87.75 109.5,90.25 | Q2.2 109.5,87.75 | VR2.5 122.53,90.95 C15.1 111.41,91.41 110.25,90.25 109.5,90.25
LR_1_MI  (via drill 0.4 pad 0.6)
  Top 0.254: U1.29 76.42,55.17 83.25,62 83.25,87.75 84,88.5 93.25,88.5 v100.5,81.25
  Bottom 0.254: Q1.1 106.15,80.8 R8.2 105.6,81.15 105.25,81.5 100.75,81.5 v100.5,81.25
LR_1_MO  (via drill 0.4 pad 0.6)
  Top 0.254: v122.75,83.25 128.25,77.75 v128.25,76.75 v128.25,55.75 128.25,50.5 125,47.25 125,43.75 128.25,40.5 v128.25,34.75 v128.25,13.75
  Bottom 0.254: R12.2 120,80.5 v122.75,83.25 | v128.25,76.75 D23.A | v128.25,55.75 D24.A | v128.25,34.75 D25.A | v128.25,13.75 D26.A
LR_2_MI  (via drill 0.4 pad 0.6)
  Top 0.254: U1.30 76.47,55.97 82.75,62.25 82.75,88 83.75,89 94,89 v100.5,82.5
  Bottom 0.254: Q1.3 106.16,82.7 R9.2 105.62,82.37 105.25,82 101,82 v100.5,82.5
LR_2_MO  (via drill 0.4 pad 0.6)
  Top 0.254: v88.25,76.75 v88.25,69 v88.25,55.75 88.25,50.75 85,47.5 85,43.75 88.25,40.5 v88.25,34.75 88.25,31.5 82.5,25.75 82.5,22 88.25,16.25 v88.25,13.75 | v106,54.75 v108,54.75 | v119.75,55.75 120,55.75 120.75,56.5 120.75,67.25 122.75,69.25 122.75,73.25 121,75 121,81 119,83 v117.75,83
  Bottom 0.254: 88.17,75.58 D19.A v88.25,76.75 | 88.17,54.58 D20.A v88.25,55.75 | 88.17,33.58 D21.A v88.25,34.75 | 88.17,12.57 D22.A v88.25,13.75 | v88.25,69 93,69 97.75,64.25 97.75,59 100.75,56 104.75,56 v106,54.75 | v108,54.75 117,54.75 117.75,54 119.25,54 119.75,54.5 v119.75,55.75 | v117.75,83 R13.2
LR_3_MI  (via drill 0.4 pad 0.6)
  Top 0.254: U1.31 76.52,56.77 82.25,62.5 82.25,88.25 83.5,89.5 97.75,89.5 v100.5,86.75
  Bottom 0.254: Q2.1 106.15,86.8 R10.2 105.6,87.15 105.25,87.5 101.25,87.5 v100.5,86.75
LR_3_MO  (via drill 0.4 pad 0.6)
  Top 0.254: v7.5,13.75 7.25,14 v7.25,34.75 7.25,41.5 5.25,43.5 5.25,47.75 7.25,49.75 v7.25,55.75 v7.25,76.75 7.25,79 14.75,86.5 41.75,86.5 47.25,92 117,92 119.5,89.5 v119.5,89
  Bottom 0.254: v7.5,13.75 7.5,13.57 D14.A | D13.A 8.43,33.58 v7.25,34.75 | D12.A 8.43,54.58 v7.25,55.75 | D11.A 8.43,75.58 v7.25,76.75 | v119.5,89 119.5,87 119,86.5 R14.2
LR_4_MI  (via drill 0.4 pad 0.6)
  Top 0.254: U1.32 76.57,57.57 81.75,62.75 81.75,88.5 83.25,90 98.5,90 v100.5,88
  Bottom 0.254: Q2.3 106.15,88.7 R11.2 105.6,88.35 105.25,88 v100.5,88
LR_4_MO  (via drill 0.4 pad 0.6)
  Top 0.254: v48.25,13.75 v48.25,34.75 48.25,40.5 45,43.75 45,47.5 48.25,50.75 v48.25,55.75 v48.25,76.75 48.25,81.5 45,84.75 45,89 47.5,91.5 116.5,91.5 118.25,89.75 118.25,89.25 v118,89
  Bottom 0.254: v118,89 R15.2 | D15.A v48.25,76.75 | D18.A v48.25,13.75 | D17.A v48.25,34.75 | D16.A v48.25,55.75
MISO  (via drill 0.4 pad 0.6)
  Top 0.254: U1.11 60.81,50.37 59.98,49.54 v59.98,45.22
  Bottom 0.254: v59.98,45.22 59.47,44.71 56.93,44.71 56.68,44.97 56.68,47.25 CONN1.1
MOSI
  Top 0.254: U1.10 62.37,51.17 62.01,50.81 59.98,50.81 59.47,50.3 59.47,47.51 CONN1.4
MUX_COMMON_1
  Top 0.254: U1.40 68.33,61.42 67.25,62.5 67.25,72 77.14,81.89 CONN6.3
MUX_S0_3V3
  Top 0.203: U5.11 71.92,65.67 73.75,67.5 73.83,67.57 73.83,72.08 76.25,74.5 77.5,74.5 CONN6.8
MUX_S0_5V
  Top 0.254: U1.37 70.73,61.81 71.16,62.24 72.94,62.24 73.19,62.49 U5.12
MUX_S1_3V3  (via drill 0.4 pad 0.6)
  Top 0.203: U5.8 68.11,66.36 70,68.25 70,72.25 v71.5,73.75
  Bottom 0.203: v71.5,73.75 74.21,73.75 CONN6.7
MUX_S1_5V
  Top 0.254: U1.38 69.93,61.95 69.38,62.49 U5.9
MUX_S2_3V3
  Top 0.254: U5.3 73.19,75.27 CONN6.5
MUX_S2_5V
  Top 0.203: U1.36 71.53,61.53 71.75,61.75 73.3,61.75 73.8,62.25 73.8,65.3 74.46,65.96 U5.2
MUX_S3_3V3
  Top 0.254: U5.6 69.38,73.38 76.63,80.63 78.54,80.63 CONN6.6
MUX_S3_5V
  Top 0.203: U1.39 69.13,61.62 68.75,62 68.75,65.75 70.65,67.65 U5.5
N$1
  Top 0.406: U1.6 C1.1
N$2
  Top 0.254: U3.15 110.63,58.7 U4.1
N$3
  Top 0.254: U3.14 110.63,59.97 U4.2
N$4
  Top 0.254: U3.13 110.63,61.24 U4.3
N$5
  Top 0.254: U3.12 110.63,62.51 U4.4
N$6
  Top 0.254: U3.11 110.63,63.78 U4.5
N$7
  Top 0.254: U3.10 110.63,65.05 U4.6
N$8
  Top 0.254: U3.9 110.63,66.32 U4.7
N$9
  Top 0.254: U4.8 114.97,67.47 115.5,66.94 115.5,65.75 116.2,65.05 U3.7
N$10
  Bottom 0.813: CONN2.5 69.82,78.72 L1.2
N$12
  Bottom 0.254: D1.2 3.42,71.18 SW1.1
N$13
  Bottom 0.254: SW2.1 3.42,61.32 D1.1
N$14
  Bottom 0.254: SW3.1 3.42,29.18 D2.2
N$15
  Bottom 0.254: SW4.1 3.42,19.32 D2.1
N$16
  Bottom 0.254: SW5.1 43.17,71.18 D3.2
N$17
  Bottom 0.254: SW6.1 43.17,61.32 D3.1
N$18
  Bottom 0.254: SW7.1 43.17,29.18 D4.2
N$19
  Bottom 0.254: SW8.1 43.17,19.32 D4.1
N$20
  Bottom 0.254: D5.2 83.17,71.18 SW9.1
N$21
  Bottom 0.254: D5.1 83.17,61.32 SW10.1
N$22
  Bottom 0.254: D6.2 83.17,29.18 SW11.1
N$23
  Bottom 0.254: D6.1 83.17,19.32 SW12.1
N$24
  Bottom 0.254: D7.2 123.17,71.18 SW13.1
N$25
  Bottom 0.254: D7.1 123.17,61.32 SW14.1
N$26
  Bottom 0.254: D8.2 123.17,29.18 SW15.1
N$27  (via drill 0.4 pad 0.6)
  Top 0.254: v121.25,20.25 121.25,22.25 v123.5,24.5
  Bottom 0.254: D8.1 124.7,23.3 v123.5,24.5 | SW16.1 123.17,18.33 v121.25,20.25
N$28
  Bottom 0.254: Q1.6 113.1,80.8 R12.1
N$29
  Bottom 0.254: Q1.4 113.1,82.7 R13.1
N$30
  Bottom 0.254: Q2.4 113.1,88.7 R15.1
N$31
  Bottom 0.254: Q2.6 113.1,86.8 R14.1
RESET
  Top 0.254: U1.13 65.93,47.1 65.82,47 63.88,47 | 63.88,47 R1.1 | CONN1.5 55.41,42.09 56.5,41 58.75,41 62.5,44.75 62.5,46.5 63,47 63.88,47
SCK
  Top 0.254: U1.9 62.41,51.97 61.76,51.32 55.66,51.32 53.89,49.54 53.89,47.51 CONN1.3
SR_IN_CLK  (via drill 0.4 pad 0.6)
  Top 0.254: U1.21 72.33,47.67 72.75,47.25 77.75,47.25 78.5,46.5 78.5,13.5 81.5,10.5 98.75,10.5 103.75,15.5 103.75,24.5 v104.25,25
  Bottom 0.254: v104.25,25 105.25,26 105.25,28.25 105.67,28.68 U2.2
SR_IN_DATA  (via drill 0.4 pad 0.6)
  Top 0.254: v99.25,18.25 96.25,18.25 89.5,11.5 82,11.5 79.5,14 79.5,46 82.75,49.25 82.75,52.75 82.25,53.25 77.5,53.25 76.25,52 74.96,52 U1.25
  Bottom 0.254: v99.25,18.25 101.65,20.65 U2.9
SR_IN_PL  (via drill 0.4 pad 0.6)
  Top 0.254: U1.22 78.18,48.57 79,47.75 79,13.75 81.75,11 98.5,11 103,15.5 103,25.25 v104.25,26.5
  Bottom 0.254: v104.25,26.5 104.5,26.75 104.5,29.25 105.19,29.95 U2.1
SW_M_11
  Bottom 0.254: D9.2 30.85,10.9 CONN3.1
SW_M_21  (via drill 0.4 pad 0.6)
  Top 0.254: CONN4.1 69.5,13 69.25,13.25 65.75,13.25 61.75,9.25 v38.5,9.25
  Bottom 0.254: v38.5,9.25 38.35,9.25 D9.1
SW_M_31
  Bottom 0.254: D10.2 110.6,10.9 CONN5.1
XTAL1
  Top 0.254: U1.17 69.13,43.44 Y1.1 75.86,41.41 C10.2
XTAL2
  Top 0.254: U1.16 68.33,43.66 Y1.2 61.41,41.41 C11.2

## Text on the board
bNames: +5V | D+ | D- | GND | S